# EAGLE board schema_puissance (EAGLE 6.4)
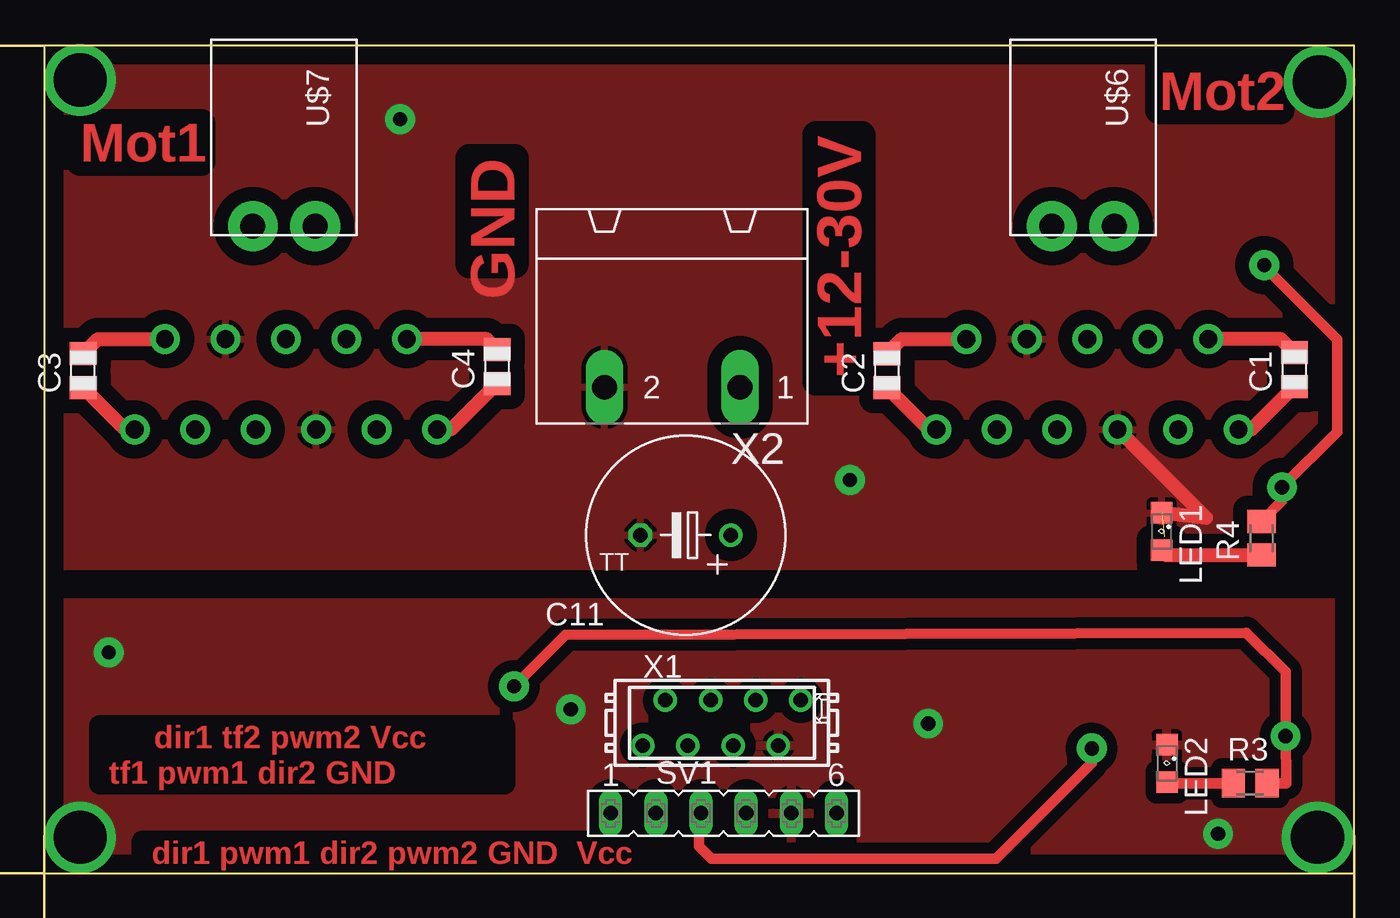
[diagram p0: board, top side]
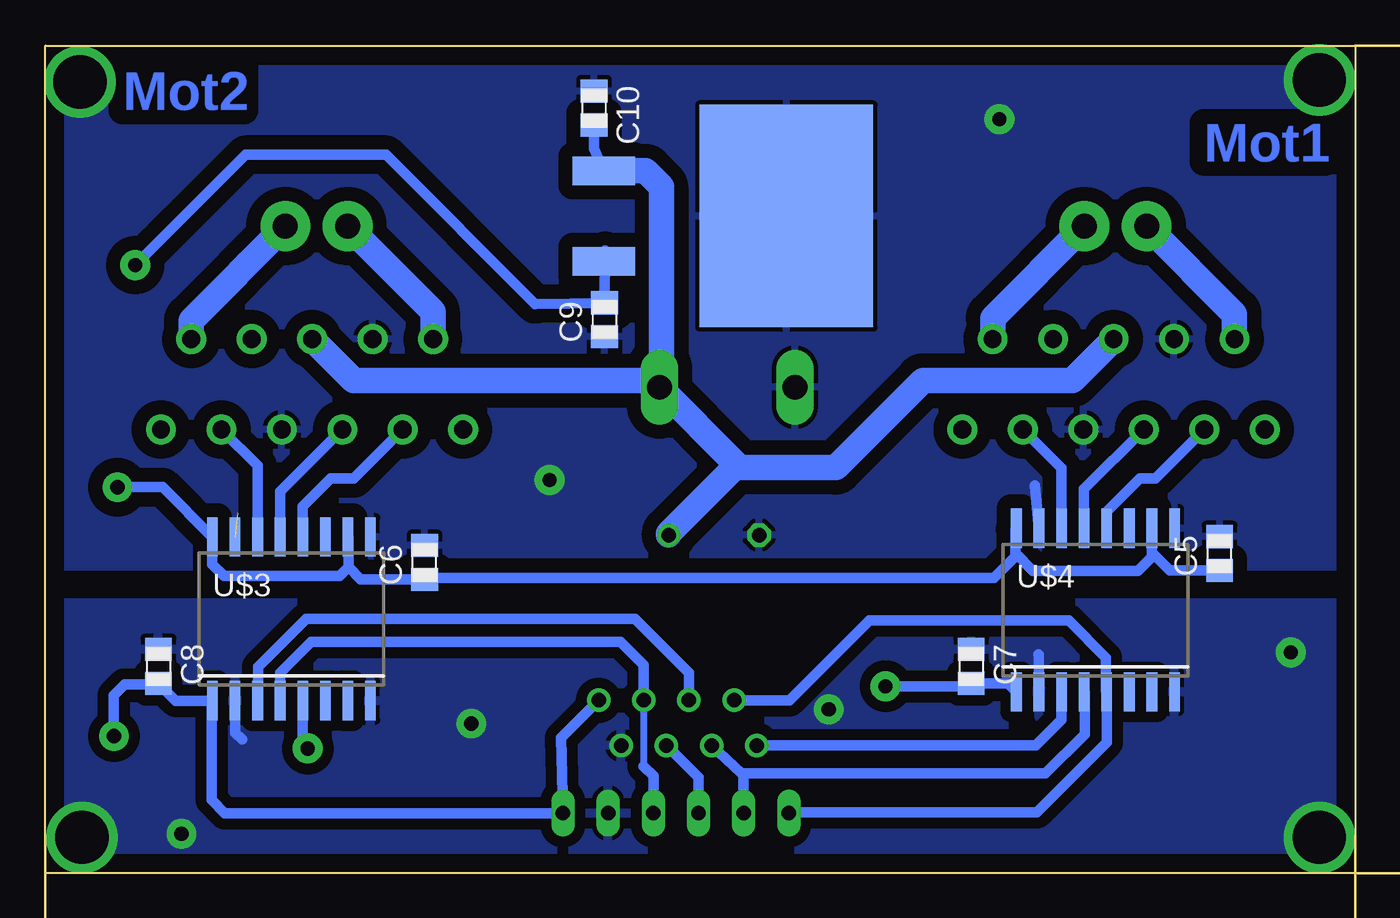
[diagram p1: board, bottom side, seen from below]

Size 73.66 x 46.55 mm. Coordinates in mm from the lower left corner, seen from the top.
Outline: 0,46.55 0,0 73.66,0 73.66,46.55 0,46.55
Copper layers (1*16): Top 0.035mm / dielectric 1.5mm / Bottom 0.035mm
Design rules "default": minimum track width 10mil, minimum drill 24mil, track to track 8mil, track to pad 8mil, pad to pad 8mil, via to via 8mil, smd to smd 8mil, copper to edge 40mil, drill to drill 8mil, minimum pad ring 10mil, minimum via ring 8mil, stop-mask expansion 4mil, vias tented up to drill 0mil, thermal gap 10mil
Milling: area 0,-5.6 to 1.5,-5; area 72.2,-5.6 to 73.7,-5; area 33.4,-4.9 to 40.3,-3.1; area -14.3,0 to -13.7,1.5; area -14.3,45.1 to -13.7,46.6; area -16.1,19.8 to -14.4,26.7; 6 lines

## Footprints (pad centres in the part's own frame; a part is rotated, then mirrored left to right if it is on the bottom)
C0805 = smd 1.3 x 1.5: 1 -0.95,0; 2 0.95,0
TT5D11 = drill 0.813: + -2.54,0 | drill 0.813 octagon: - 2.54,0
SML0805 = smd 1.2 x 1.2: A 1.05,0; C -1.05,0
M0805 = smd 1.3 x 1.6: 1 -0.95,0; 2 0.95,0
FE06 = drill 0.813 long: 1 -6.35,0; 2 -3.81,0; 3 -1.27,0; 4 1.27,0; 5 3.81,0; 6 6.35,0
LMD18200 = drill 1 pad 1.676: 1 0,0; 2 1.7,5.08; 3 3.4,0; 4 5.1,5.08; 5 6.8,0; 6 8.5,5.08; 7 10.2,0; 8 11.9,5.08; 9 13.6,0; 10 15.3,5.08; 11 17,0
SO-16W = smd 0.6 x 2.2: 1 -4.445,-4.6; 2 -3.175,-4.6; 3 -1.905,-4.6; 4 -0.635,-4.6; 5 0.635,-4.6; 6 1.905,-4.6; 7 3.175,-4.6; 8 4.445,-4.6; 9 4.445,4.6; 10 3.175,4.6; 11 1.905,4.6; 12 0.635,4.6; 13 -0.635,4.6; 14 -1.905,4.6; 15 -3.175,4.6; 16 -4.445,4.6
DPAK = smd 12.5 x 9.75: 1 0,0 | smd 1.6 x 3.5: 2 -2.54,-10.275; 3 2.54,-10.275
SL-3.5-2-90G = drill 1.4 pad 2.8: 1 0,-1.75; 2 0,1.75
MICROMATCH-8 = drill 0.813: 1 4.445,1.27; 2 3.175,-1.27; 3 1.905,1.27; 4 0.635,-1.27; 5 -0.635,1.27; 6 -1.905,-1.27; 7 -3.175,1.27; 8 -4.445,-1.27
GMSTBA2 = drill 1.397 long: 1 -3.81,5.08; 2 3.81,5.08

## Placement (x,y rotation side)
C1  10nF  [C0805]  70.31,28.33 90 top
C2  10nF  [C0805]  47.39,28.27 90 top
C3  10nF  [C0805]  2.18,28.27 90 top
C4  10nF  [C0805]  25.46,28.5 90 top
C5  100nF  [C0805]  7.62,17.98 90 bottom
C6  100nF  [C0805]  52.34,17.48 90 bottom
C7  100nF  [C0805]  21.59,11.62 270 bottom
C8  100nF  [C0805]  67.31,11.62 270 bottom
C9  100nF  [C0805]  42.21,31.13 90 bottom
C10  330nF  [C0805]  42.81,43.04 270 bottom
C11  2200u  [TT5D11]  36.06,19.01 180 top
LED1  [SML0805]  62.84,19.22 270 top
LED2  [SML0805]  63.14,6.17 270 top
R3  1k  [M0805]  67.82,5.06 0 top
R4  1k  [M0805]  68.46,18.84 90 top
SV1  [FE06]  38.2,3.37 0 top
U$1  LMD18200  [LMD18200]  5.08,24.96 0 top
U$2  LMD18200  [LMD18200]  50.16,24.96 0 top
U$3  ADUM1400S  [SO-16W]  59.83,14.3 0 bottom
U$4  ADUM1400S  [SO-16W]  14.61,14.8 0 bottom
U$5  L7805TO263  [DPAK]  31.98,36.97 270 bottom
U$6  SL-3.5-2-90G  [SL-3.5-2-90G]  58.42,36.39 270 top
U$7  SL-3.5-2-90G  [SL-3.5-2-90G]  13.47,36.39 270 top
X1  MICROMATCH-8  [MICROMATCH-8]  38.1,8.45 0 top
X2  GMSTBA2  [GMSTBA2]  35.31,32.41 180 top

## Library data of the parts
C1-C11 R3 R4 = rcl
LED1 LED2 = led
SV1 = con-lsta; OC_FARNELL: unknown; OC_NEWARK: unknown
U$1 U$2 = texas
U$3 U$4 = analog-devices
U$5 = st-microelectronics
U$6 U$7 = WEIDMULLER
X1 = con-amp-micromatch; MF: FARNELL; MPN: 7-215464-8; OC_FARNELL: 3784642; OC_NEWARK: 26H0301
X2 = con-phoenix-762; MF: FARNELL; MPN: 1757242; OC_FARNELL: 3705171; OC_NEWARK: 71C4161

## Nets
+5V: C5.1 C6.1 C9.2 R4.2 U$3.10 U$3.16 U$4.10 U$4.16 U$5.3
+12V: C10.2 C11.+ U$1.6 U$2.6 U$5.2 X2.1
C_DIR1: SV1.1 U$4.5 X1.7
C_DIR2: SV1.3 U$3.5 X1.4
C_PWM1: SV1.2 U$4.4 X1.6
C_PWM2: SV1.4 U$3.4 X1.3
C_TF1: U$4.3 X1.8
C_TF2: U$3.3 X1.5
DIR1: U$1.3 U$4.12
DIR2: U$2.3 U$3.12
GND: C7.1 C8.1 LED2.C SV1.5 U$3.2 U$3.8 U$4.2 U$4.8 X1.2
GNDA: C5.2 C6.2 C9.1 C10.1 C11.- LED1.C U$1.4 U$1.7 U$2.4 U$2.7 U$3.9 U$3.15 U$4.9 U$4.15 U$5.1 X2.2
N$1: C1.1 U$2.11
N$2: LED1.A R4.1
N$3: C2.1 U$2.1
N$4: LED2.A R3.1
N$5: C3.1 U$1.1
N$7: C4.1 U$1.11
POLE_1_MOT1: C3.2 U$1.2 U$7.1
POLE_1_MOT2: C2.2 U$2.2 U$6.1
POLE_2_MOT1: C4.2 U$1.10 U$7.2
POLE_2_MOT2: C1.2 U$2.10 U$6.2
PWM1: U$1.5 U$4.13
PWM2: U$2.5 U$3.13
TF1: U$1.9 U$4.14
TF2: U$2.9 U$3.14
VCC: C7.2 C8.2 R3.2 SV1.6 U$3.1 U$4.1 X1.1

## Tracks (layer width: path | path; a pad name or v marks a point on that pad's centre or on a via)
+5V  (via drill 0.8 pad 1.68)
  Top 0.6: R4.2 69.61,20.94 v69.61,21.71 72.71,24.81 72.71,30.01 68.61,34.11 v68.61,34.21
  Bottom 0.6: v69.61,21.71 67.08,21.71 U$3.16 64.27,17.37 63.61,16.71 57.11,16.71 56.61,17.21 | 56.61,17.21 55.92,16.53 C6.1 52.26,16.61 20.31,16.61 19.11,17.81 19.11,18.01 | 56.61,17.21 56.61,18.86 U$3.10 | C5.1 10.43,17.03 11.43,18.03 | 11.43,18.03 U$4.10 | U$4.16 19.11,19.34 19.11,18.01 | 19.11,18.01 18.11,17.01 12.21,17.01 11.43,17.79 11.43,18.03 | U$5.3 42.18,35.01 C9.2 46.11,32.01 54.51,40.41 62.41,40.41 v68.61,34.21
+12V
  Bottom 0.6: C10.2 42.81,40.76 U$5.2
  Bottom 1.422: U$1.6 15.91,27.71 24.31,27.71 29.21,22.81 34.6,22.81 34.76,22.96 | U$2.6 56.33,27.71 39.5,27.71 X2.1 | U$5.2 39.91,39.51 39.01,38.61 39.01,27.44 X2.1 | 34.76,22.96 X2.1 | C11.+ 38.6,19.12 34.76,22.96
C_DIR1
  Bottom 0.6: SV1.1 31.11,3.41 17.91,3.41 13.97,7.35 U$4.5 14.01,10.24 14.01,12.11 16.11,14.21 27.31,14.21 31.8,9.72 X1.7
C_DIR2  (via drill 0.8 pad 1.68)
  Top 0.6: v58.91,7.01 58.91,6.21 53.51,0.81 37.51,0.81 36.81,1.51 36.81,3.25 SV1.3
  Bottom 0.6: X1.4 36.93,5.37 SV1.3 | U$3.5 59.19,7.29 v58.91,7.01
C_PWM1
  Bottom 0.6: X1.6 34.52,5.6 | 34.52,5.6 34.39,5.48 SV1.2 | U$4.4 15.21,10.17 15.21,7.81 17.42,5.6 34.52,5.6
C_PWM2
  Bottom 0.4: X1.3 40.01,6.01
  Bottom 0.6: U$3.4 60.46,11.26 58.71,13.01 41.31,13.01 40.01,11.71 X1.3 | 40.01,6.01 39.47,5.47 SV1.4
C_TF1
  Bottom 0.6: U$4.3 16.51,8.61 17.94,7.18 X1.8
C_TF2
  Bottom 0.6: U$3.3 61.71,9.72 61.71,11.61 59.01,14.31 40.51,14.31 37.46,11.27 X1.5
DIR1
  Bottom 0.6: U$1.3 11.23,22.21 12.11,22.21 13.97,20.35 U$4.12
DIR2
  Bottom 0.6: U$2.3 56.31,22.21 57.61,22.21 59.19,20.63 U$3.12
GND  (via drill 0.8 pad 1.68, 3 pad 1.42)
  Bottom 0.6: U$3.2 63,7.9 62.61,7.51 | U$4.2 17.78,12.28 17.81,12.31
  other vias: 3.61,12.41 49.71,8.41 66.01,2.21 29.61,9.21 71.61,2.01 2.01,2.01
  pour Bottom (isolate 0.61): 0.01,-0.09 0.11,15.21 73.61,15.21 73.51,-0.09
  pour Top (isolate 0.61): 0.11,15.21 0.11,-0.09 73.61,-0.09 73.61,15.21
GNDA  (via drill 0.8 pad 1.68, 3 pad 1.42)  (1 unrouted)
  Top 0.8: U$2.7 65.34,19.98 LED1.C
  Bottom 0.6: U$4.15 17.81,19.63 18.01,21.81
  other vias: 45.31,22.11 20.01,42.41 2.01,44.61 71.71,44.51
  pour Bottom (isolate 0.8): 0.11,17.21 0.11,46.21 73.61,46.21 73.61,17.21
  pour Top (isolate 0.8): 0.11,17.21 0.11,46.21 73.61,46.21 73.61,17.21
N$1
  Top 0.8: C1.1 67.89,24.96 U$2.11
N$2
  Top 0.8: LED1.A 63.12,17.89 R4.1
N$3
  Top 0.8: C2.1 49.74,24.96 U$2.1
N$4
  Top 0.6: R3.1 63.2,5.06 LED2.A
N$5
  Top 0.8: C3.1 4.54,24.96 U$1.1
N$7
  Top 0.8: C4.1 22.87,24.96 U$1.11
POLE_1_MOT1
  Top 0.8: C3.2 3,30.04 U$1.2
  Bottom 1.422: U$7.1 6.78,31.45 U$1.2
POLE_1_MOT2
  Top 0.8: C2.2 48.21,30.04 U$2.2
  Bottom 1.422: U$6.1 51.87,31.59 U$2.2
POLE_2_MOT1
  Top 0.8: C4.2 24.87,30.04 U$1.10
  Bottom 1.422: U$7.2 20.38,31.23 U$1.10
POLE_2_MOT2
  Top 0.8: C1.2 69.55,30.04 U$2.10
  Bottom 1.422: U$6.2 65.47,31.09 U$2.10
PWM1
  Bottom 0.6: U$1.5 15.24,21.6 U$4.13
PWM2
  Bottom 0.6: U$2.5 60.46,21.46 U$3.13
TF1
  Bottom 0.6: U$1.9 16.51,22.79 U$4.14
TF2
  Bottom 0.6: U$2.9 61.73,22.93 U$3.14
VCC  (via drill 0.8 pad 1.68)
  Top 0.6: R3.2 69.86,5.06 v69.81,7.71 69.81,11.31 67.61,13.51 29.31,13.41 v26.41,10.51
  Bottom 0.6: v69.81,7.71 69.81,10.01 69.21,10.61 67.38,10.61 C8.2 66.33,9.7 U$3.1 64.31,9.66 64.31,4.11 63.57,3.37 SV1.6 44.65,7.61 X1.1 | U$4.1 19.52,10.68 C7.2 21.75,10.51 v26.41,10.51

## Text on the board
Top: Mot2 | +12-30V | Mot1 | GND | dir1 tf2 pwm2 Vcc / tf1 pwm1 dir2 GND | dir1 pwm1 dir2 pwm2 GND Vcc
Bottom: Mot2 | Mot1